# Altium PCB z62_pcb.PcbDoc
Units mm, origin at the board's own origin, x right, y up, seen from the top; angles counter-clockwise.
Board outline 57.75 x 75.25 mm, 2 copper layers (Top Layer, Bottom Layer), stack 1.571 mm thick; 6 components, 0 nets, 85 pads, 0 vias.
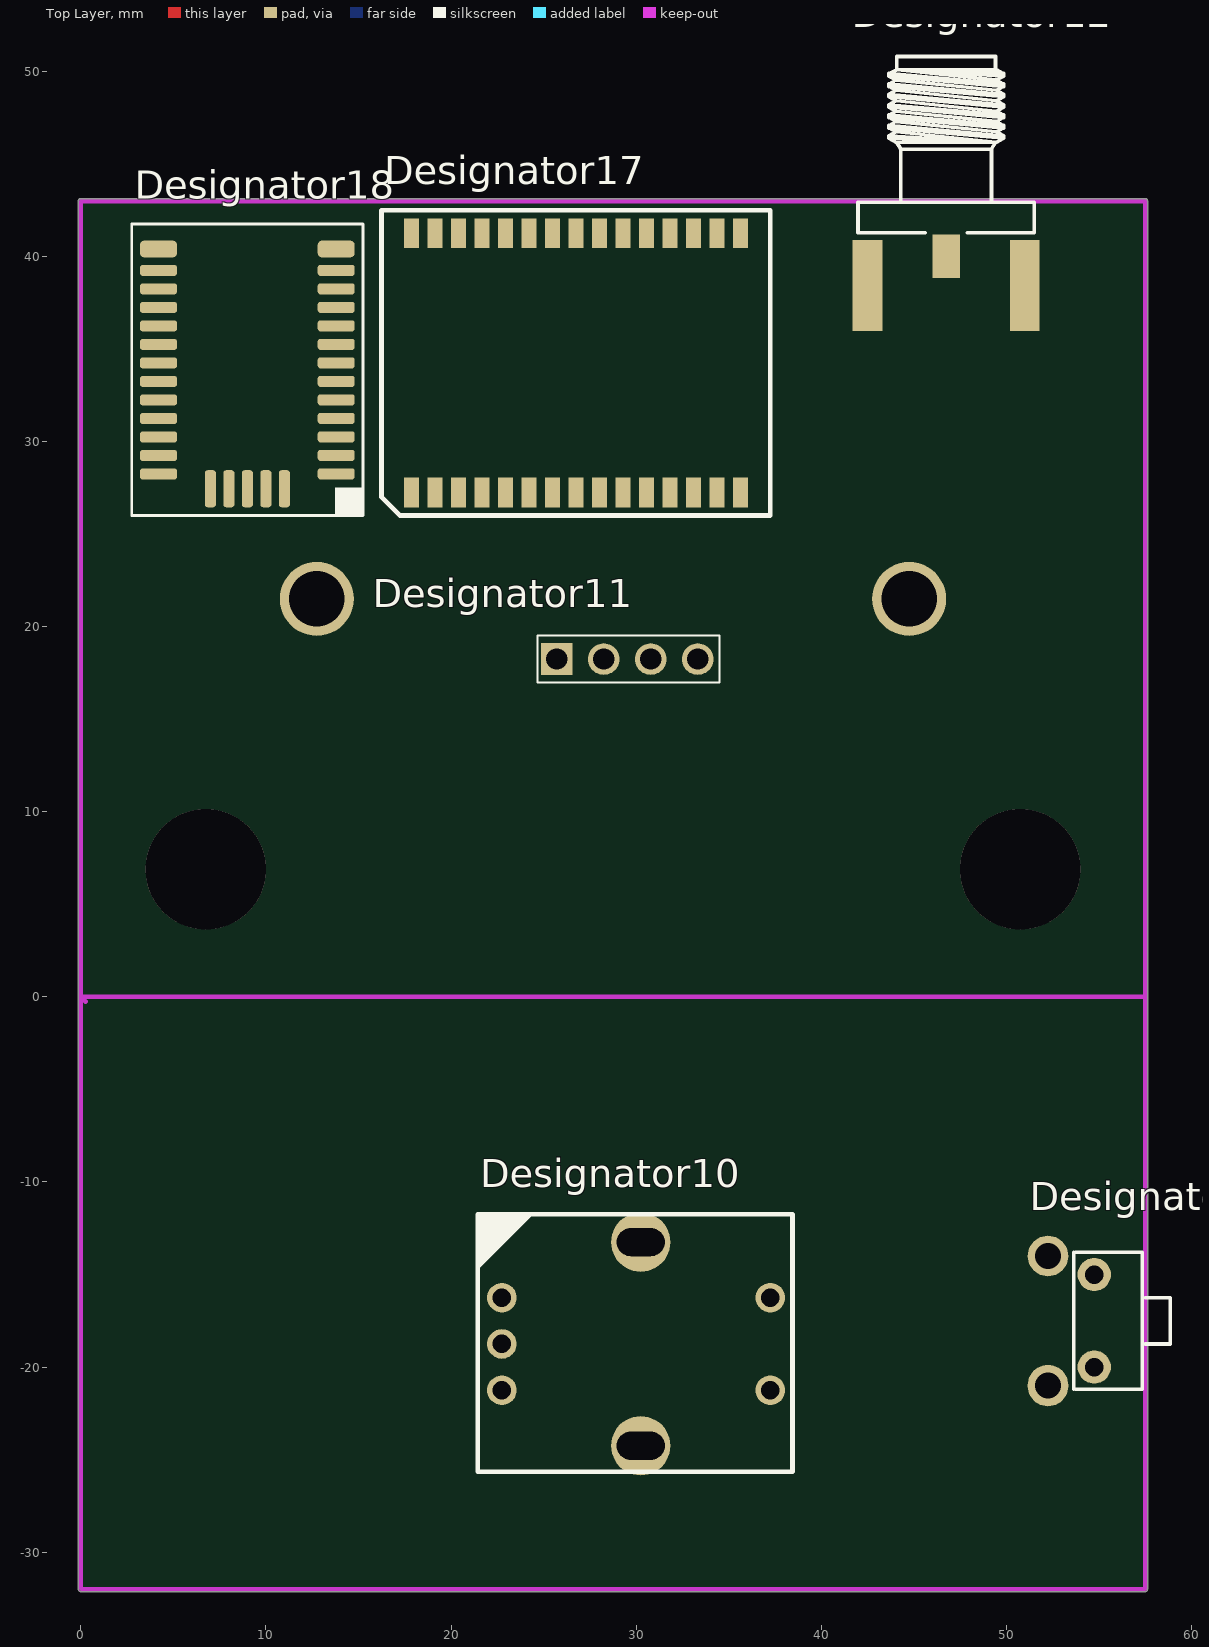
[diagram p0: Top Layer view]
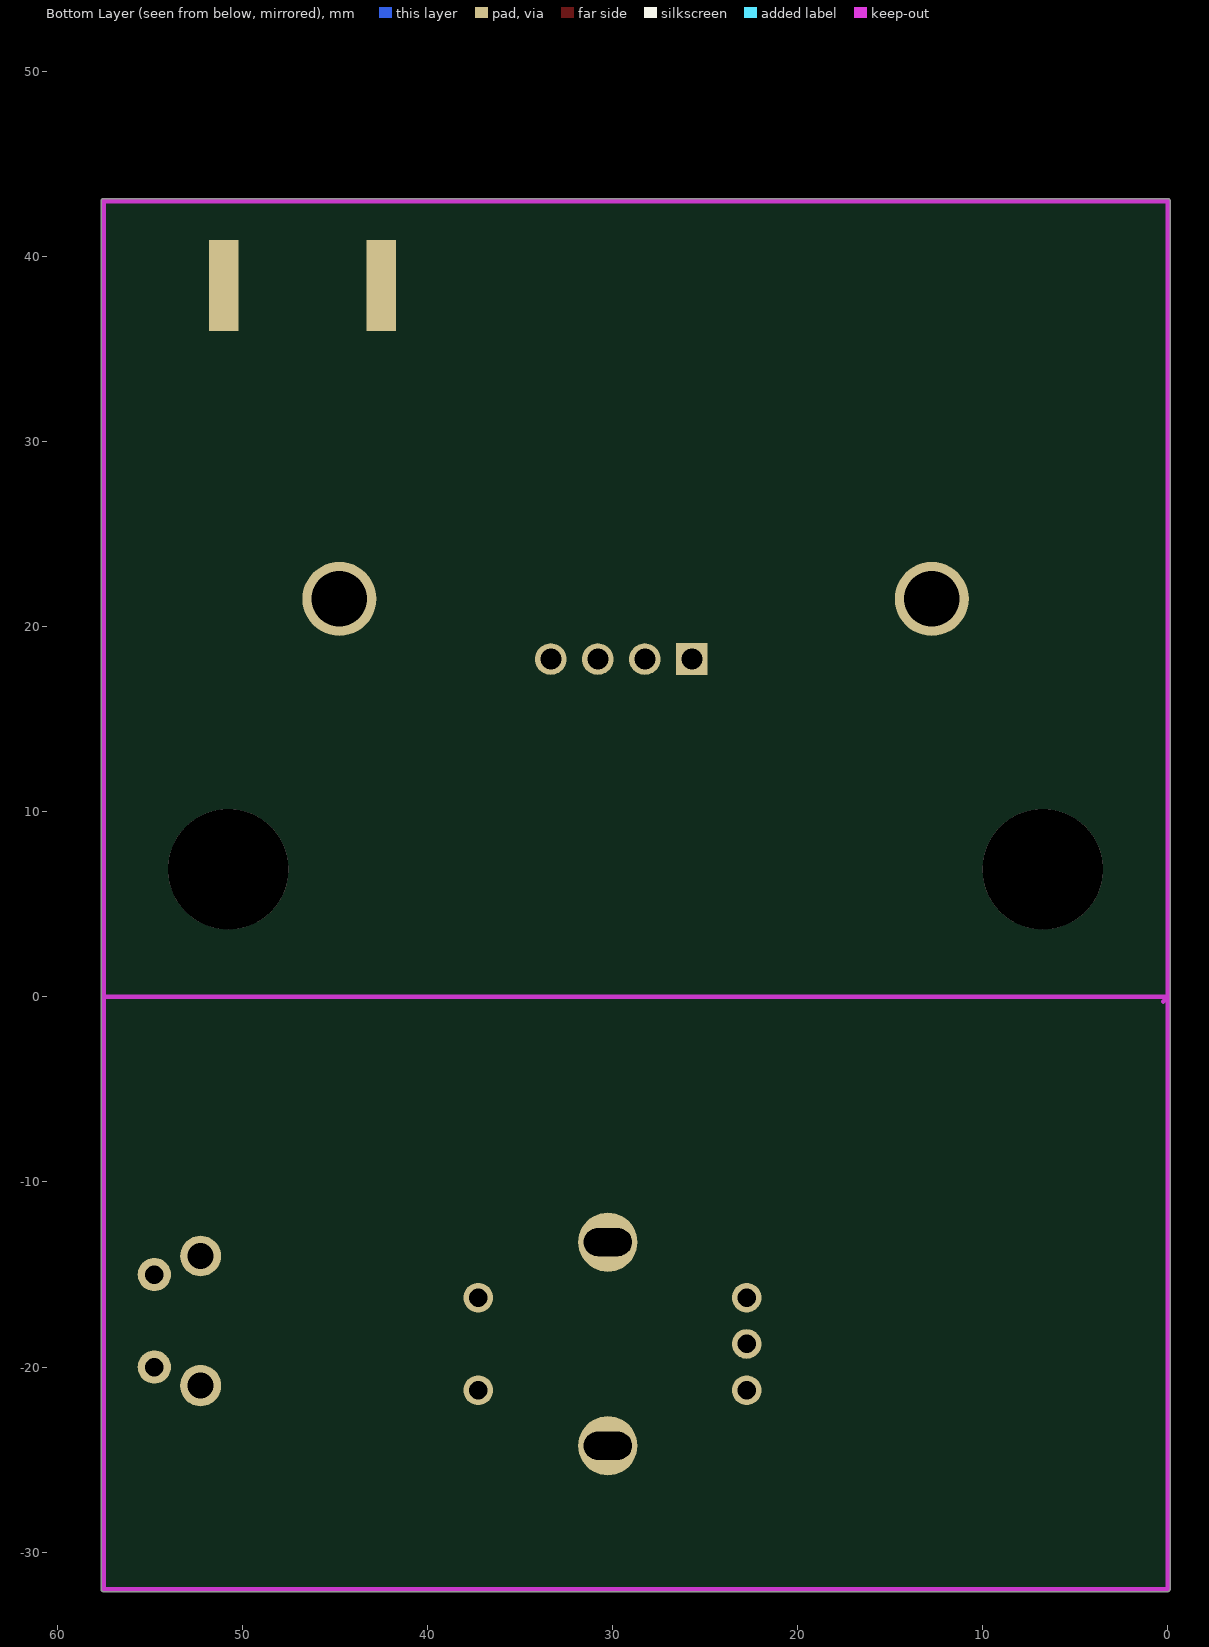
[diagram p1: Bottom Layer view, seen from below]

## Layer stack, top to bottom
Top Solder: solder mask 0.0102, Solder Resist, Dk 3.5
Top Layer: signal copper 0.0356
Dielectric 1: dielectric 1.5, FR-4, Dk 4.8
Bottom Layer: signal copper 0.0356
Bottom Solder: solder mask 0.0102, Solder Resist, Dk 3.5

## Board outline
-0.127,-32 ccw(c0,-32) 0,-32.127 57.5,-32.127 ccw(c57.5,-32) 57.627,-32 57.627,43 ccw(c57.5,43) 57.5,43.127 0,43.127 ccw(c0,43) -0.127,43

## Design rules (kind name [scope] priority, off if disabled: settings)
Clearance [All] p1: gap=0.254 ignorepadtopadclearanceinfootprint=FALSE
PolygonConnect [All] p1: connectstyle=Relief reliefconductorwidth=0.254 reliefentries=4 polygonreliefangle="90 Angle" airgapwidth=0.254
RoutingVias [All] p1: holewidth=0.711 width=1.27 viastyle="Through Hole" minholewidth=0.711 minwidth=1.27 maxholewidth=0.711 maxwidth=1.27
SolderMaskExpansion [All] p1: expansion=0.102 istentingtop=FALSE
Width [All] p1: maxlimit=0.254 minlimit=0.254 preferedwidth=0.254
30 further rules are at their usual default settings.

## Components (designator, comment, footprint, x,y, rotation, side; value= is the part's Value field where it differs from the comment)
Designator10 "Comment" EC11 30.25,-18.75 r0 top
Designator11 "Comment" OLED096_I2C 25.71,18.25 r0 top
Designator12 "Comment" AMPHENOL_132357-11 46.75,40 r270 top
Designator17 "Comment" E77XX-M22 26.75,34.25 r90 top
Designator18 "Comment" LGA_SIM32 9,34.25 r180 top
Designator19 "Comment" KLS7-TS3602 54.75,-17.5 r90 top

## Footprints (in the part's own frame and the unit in brackets; to place one, negate y for a bottom-side part, rotate by r counter-clockwise, add the part's x,y. Pads: shape width x height; smd on the part's side, far side on the other; paste and mask are expansions set on the pad)
AMPHENOL_132357-11 [mm] "SMA End Launch Jack for 1.58mm PCB, 50 Ohm, Flat Tab Contact"
  rect 2.35x1.5 smd: 1(0,0)
  rect 4.9x1.6 smd: 2(1.575,4.25) 2(1.575,-4.25)
  rect 4.9x1.6 smd far side: 2(1.575,4.25) 2(1.575,-4.25)
  silkscreen extent -10.81,-4.76 -1.28,4.76, body extent -10.8,-4.76 3.48,4.76, height 4.08
E77XX-M22 [mm]
  rect 1.6x0.8 smd: 1(-7,8.89) 2(-7,7.62) 3(-7,6.35) 4(-7,5.08) 5(-7,3.81) 6(-7,2.54) 7(-7,1.27) 8(-7,0) 9(-7,-1.27) 10(-7,-2.54) 11(-7,-3.81) 12(-7,-5.08) 13(-7,-6.35) 14(-7,-7.62) 15(-7,-8.89) 16(7,-8.89) 17(7,-7.62) 18(7,-6.35) 19(7,-5.08) 20(7,-3.81) 21(7,-2.54) 22(7,-1.27) 23(7,0) 24(7,1.27) 25(7,2.54) 26(7,3.81) 27(7,5.08) 28(7,6.35) 29(7,7.62) 30(7,8.89)
  silkscreen extent -8.25,-10.5 8.25,10.5, body extent -7,-9.68 7,10.3, height 2.7
EC11 [mm] "ALPS rotary encoder"
  round 1.6 hole 1: 1(-7.5,2.5) 2(-7.5,0) 3(-7.5,-2.5) 4(7,-2.5) 5(7,2.5)
  round 3.2 hole 1.5 slot 2.6 at 0 deg: 6(0,-5.5) 6(0,5.5)
  silkscreen extent -8.8,-6.9 8.2,7, body extent -7.73,-5.86 7.22,5.86, height 19.5
KLS7-TS3602 [mm] "miniature switch"
  round 1.8 hole 1: 1(-2.5,0) 2(2.5,0)
  oval 2.25x2.2 hole 1.4: 3(-3.5,2.5)
  round 2.2 hole 1.4: 3(3.5,2.5)
  silkscreen extent -3.7,-4.1 3.7,1.1, body extent -3.7,-3.97 3.6,3.75, height 4.4
LGA_SIM32 [mm] "0mm"
  rrect50% 2x0.6 smd mask+0.1: 1(-4.8,6) 2(-4.8,5) 3(-4.8,4) 4(-4.8,3) 5(-4.8,2) 6(-4.8,1) 7(-4.8,0) 8(-4.8,-1) 9(-4.8,-2) 10(-4.8,-3) 11(-4.8,-4) 12(-4.8,-5) 15(4.8,-5) 16(4.8,-4) 17(4.8,-3) 18(4.8,-2) 19(4.8,-1) 20(4.8,0) 21(4.8,1) 22(4.8,2) 23(4.8,3) 24(4.8,4) 25(4.8,5) 26(4.8,6)
  rrect50% 2x0.9 smd mask+0.1: 13(-4.8,-6.15) 14(4.8,-6.15)
  rrect50% 0.6x2 smd mask+0.1: 27(2,6.8) 28(1,6.8) 29(0,6.8) 30(-1,6.8) 31(-2,6.8)
  silkscreen extent -6.25,-7.5 6.25,8.25, body extent -4.8,-7.22 4.8,6.75, height 2.25
OLED096_I2C [mm] "Header, Vertical, 2.54 mm pitch; 0.70 mm lead width, 7 pins, 1 row, 7 pins per row, 16.51 mm L X 2.54 mm W X 7.54 mm H body"
  rect 1.71x1.71 hole 1.14 paste-2539.97: 1(0,0)
  round 1.71 hole 1.14 paste-2539.97: 2(2.54,0) 3(5.08,0) 4(7.62,0)
  silkscreen extent -1.04,-1.27 8.8,1.27, body extent -10.19,-26.7 17.81,1.3, height 7.08

## Free pads (board coordinates)
  round 6.5 hole 6.5: 8(6.75,6.9) 9(50.75,6.9)
  round 4 hole 3: 10(12.75,21.5) 11(44.75,21.5)

## Nets (pads, with @x,y where several pads share a name; then routed paths per layer and width w, separated by ;. In a path a pad name is that pad's centre, name@x,y a point inside that pad or via, vN(x,y) a via of type N, cw(c..) or ccw(c..) an arc to the next point about the centre after c; other vN are vias at no path point)
pads on no net: Designator10.1 Designator10.2 Designator10.3 Designator10.4 Designator10.5 Designator10.6 Designator11.1 Designator11.2 Designator11.3 Designator11.4 Designator12.1 Designator12.2 Designator17.1 Designator17.2 Designator17.3 Designator17.4 Designator17.5 Designator17.6 Designator17.7 Designator17.8 Designator17.9 Designator17.10 Designator17.11 Designator17.12 Designator17.13 Designator17.14 Designator17.15 Designator17.16 Designator17.17 Designator17.18 Designator17.19 Designator17.20 Designator17.21 Designator17.22 Designator17.23 Designator17.24 Designator17.25 Designator17.26 Designator17.27 Designator17.28 Designator17.29 Designator17.30 Designator18.1 Designator18.2 Designator18.3 Designator18.4 Designator18.5 Designator18.6 Designator18.7 Designator18.8 Designator18.9 Designator18.10 Designator18.11 Designator18.12 Designator18.13 Designator18.14 Designator18.15 Designator18.16 Designator18.17 Designator18.18 Designator18.19 Designator18.20 Designator18.21 Designator18.22 Designator18.23 Designator18.24 Designator18.25 Designator18.26 Designator18.27 Designator18.28 Designator18.29 Designator18.30 Designator18.31 Designator19.1 Designator19.2 Designator19.3

## Keep-outs
Keep-Out Layer:
  lines w0.254: 0.25,-0.25 0,0 ; 0,0 0,-32 57.5,-32 57.5,0 ; 0,0 0,43 57.5,43 57.5,0 ; 0,0 57.5,0